# Altium PCB HID.PcbDoc
Units mm, origin at the board's own origin, x right, y up, seen from the top; angles counter-clockwise.
Board outline 33.15 x 33.15 mm, 2 copper layers (Top Layer, Bottom Layer); 10 components, 14 nets, 89 pads, 0 vias.
Unrouted connection lines stored in the file: 14.
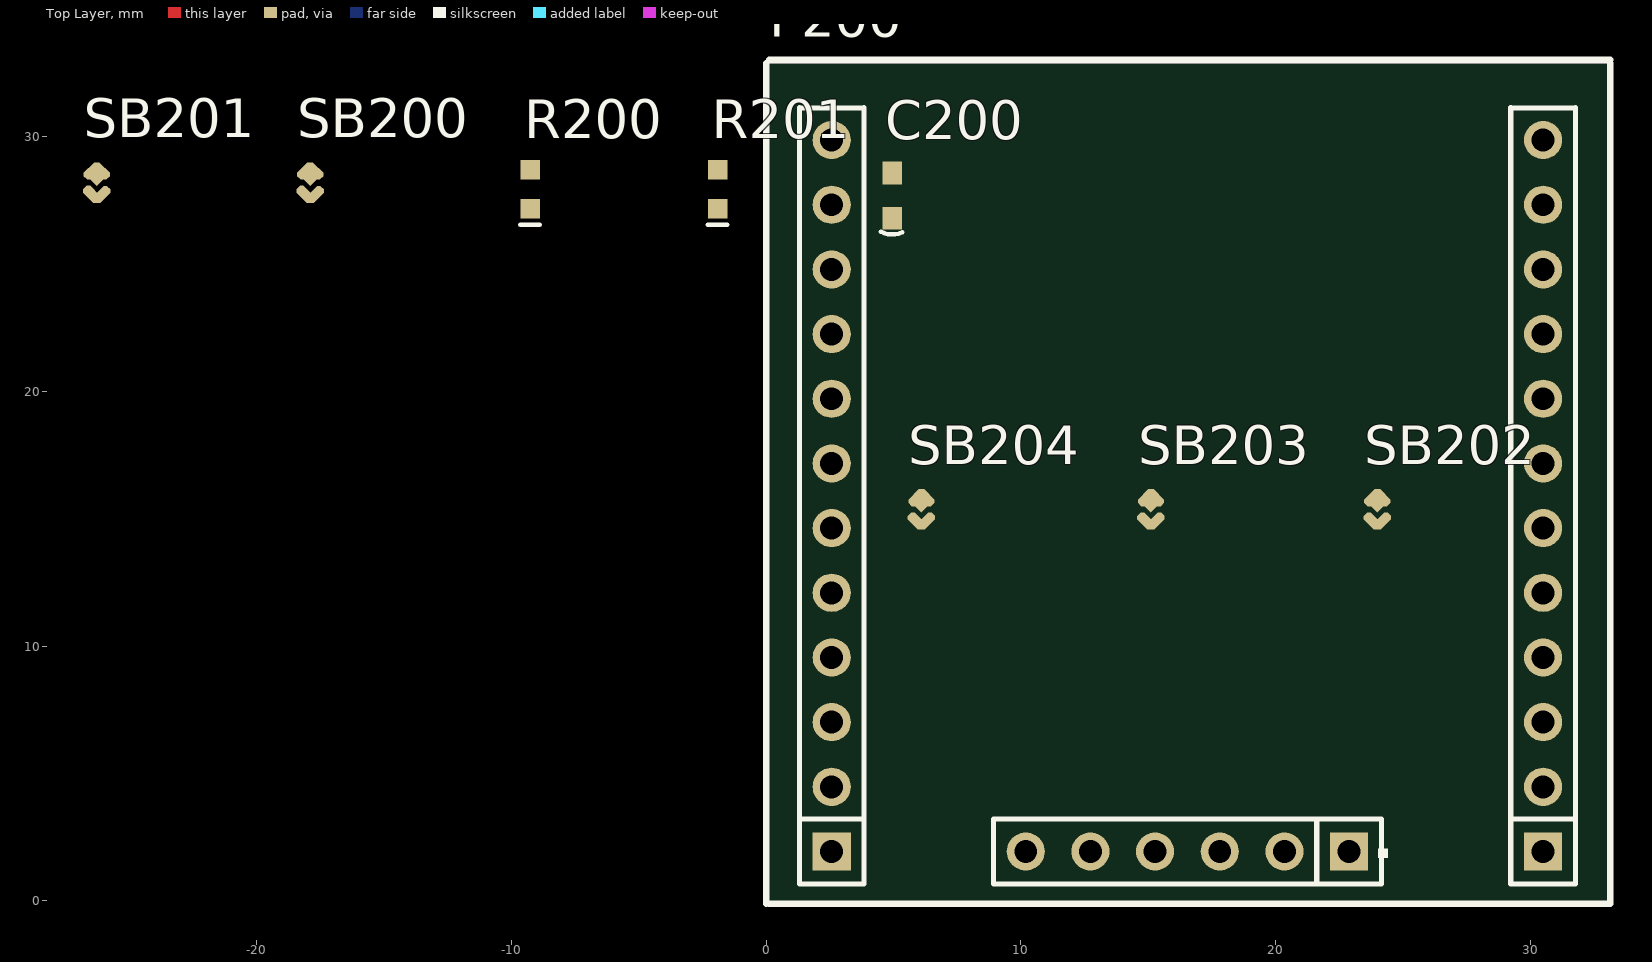
[diagram p0: Top Layer view]
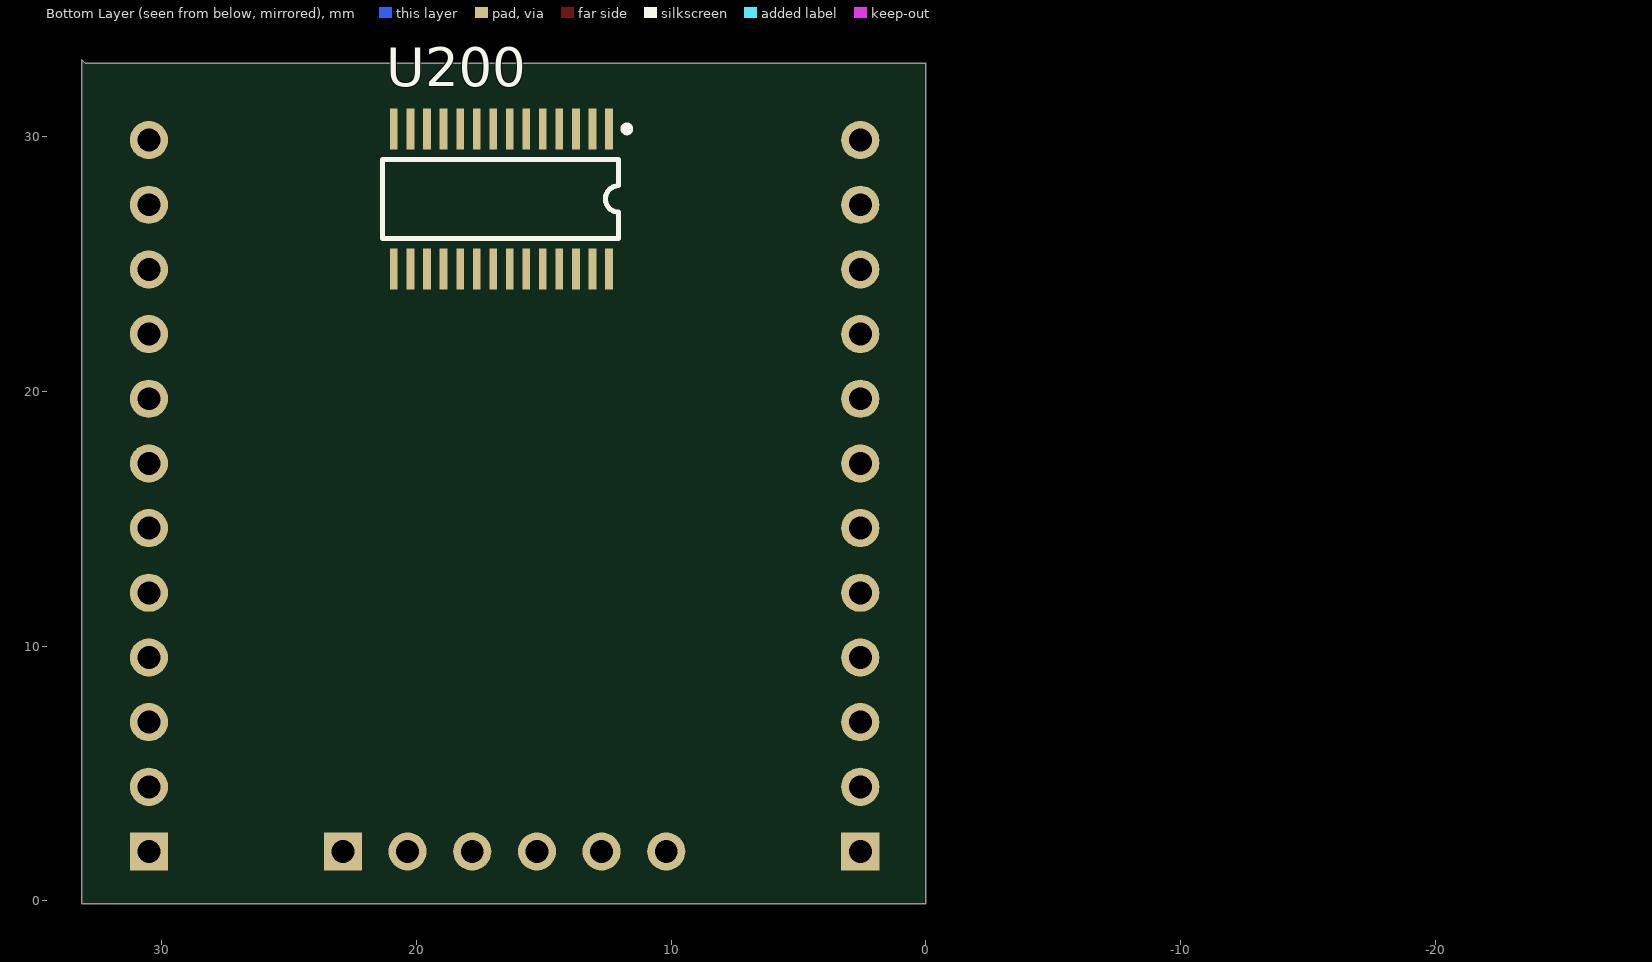
[diagram p1: Bottom Layer view, seen from below]

## Layer stack, top to bottom
Top Solder: solder mask 0.0102, Solder Resist, Dk 3.5
Top Layer: signal copper 0.0356
Dielectric 1: dielectric 0.32, FR-4, Dk 4.8
Bottom Layer: signal copper 0.0356
Bottom Solder: solder mask 0.0102, Solder Resist, Dk 3.5

## Board outline
0,-0.127 0,32.893 33.02,32.893 33.147,33.02 33.147,-0.127

## Design rules (kind name [scope] priority, off if disabled: settings)
Clearance [All] p1: gap=0.254
PolygonConnect [All] p1: connectstyle=Relief reliefconductorwidth=0.254 reliefentries=4 polygonreliefangle="90 Angle" airgapwidth=0.254
RoomDefinition HID [InComponentClass('HID')] p1: confinementstyle=ConfineIn formatcopy=TRUE lockcomponents=FALSE outline -0.381,-0.635 33.655,-0.635 33.655,33.655 -0.381,33.655
RoutingVias [All] p1: holewidth=0.711 width=1.27 viastyle="Through Hole" minholewidth=0.711 minwidth=1.27 maxholewidth=0.711 maxwidth=1.27
SolderMaskExpansion [All] p1: expansion=0.102
Width [All] p1: maxlimit=0.254 minlimit=0.254 preferedwidth=0.254
29 further rules are at their usual default settings.

## Components (designator, comment, footprint, x,y, rotation, side; value= is the part's Value field where it differs from the comment)
C200 "0.1uF" C0603L 4.953,27.686 r90 top
P200 "Synio-Full" Synio-Full 0,-0.127 r0 top
R200 "1K" R0603 -9.271,27.94 r90 top
R201 "1K" R0603 -1.905,27.94 r90 top
SB200 "Circuit Breaker" JP2_SMD -17.907,28.194 r90 top
SB201 "Circuit Breaker" JP2_SMD -26.289,28.194 r90 top
SB202 "Circuit Breaker" JP2_SMD 24.003,15.367 r90 top
SB203 "Circuit Breaker" JP2_SMD 15.113,15.367 r90 top
SB204 "Circuit Breaker" JP2_SMD 6.096,15.367 r90 top
U200 "TTP229BSFN" TSSOP28 18.161,24.13 r270 bottom

## Footprints (in the part's own frame and the unit in brackets; to place one, negate y for a bottom-side part, rotate by r counter-clockwise, add the part's x,y. Pads: shape width x height; smd on the part's side, far side on the other; paste and mask are expansions set on the pad)
C0603L [mil]
  rect 35x30 smd: 1(-35,0) 2(35,0)
  silkscreen extent -60,-16 -56,18, body extent -31,-16 32,15, height 24
JP2_SMD [mil]
  oct 15x30 smd rot 45: 1(-18,-8) 2(18,7)
  oct 15.75x30 smd rot 135: 1(-18,8)
  rect 26x26 smd rot 45: 2(13,0)
  oct 15x30 smd rot 135: 2(18,-7)
R0603 [mil]
  rect 30x30 smd: 1(-30,0) 2(30,0)
  silkscreen extent -55,-15 -55,15, body extent -31,-16 32,15, height 18
Synio-Full [mm]
  round 1.5 hole 0.9: 1(2.575,29.997) 2(2.575,27.457) 3(2.575,24.917) 4(2.575,22.377) 5(2.575,19.837) 6(2.575,17.297) 7(2.575,14.757) 8(2.575,12.217) 9(2.575,9.677) 10(2.575,7.137) 11(2.575,4.597) 13(10.195,2.057) 14(12.735,2.057) 15(15.275,2.057) 16(17.815,2.057) 17(20.355,2.057) 20(30.515,4.597) 21(30.515,7.137) 22(30.515,9.677) 23(30.515,12.217) 24(30.515,14.757) 25(30.515,17.297) 26(30.515,19.837) 27(30.515,22.377) 28(30.515,24.917) 29(30.515,27.457) 30(30.515,29.997)
  rect 1.5x1.5 hole 0.9: 12(2.575,2.057) 18(22.895,2.057) 19(30.515,2.057)
  silkscreen extent 0,0 33.15,33.15, body extent 1.13,0.64 31.99,31.25, height 8.51
TSSOP28 [mm] "Shrink Small Outline; 20 Leads; Body Width 4.4 mm; Pitch 0.65 mm"
  rect 1.6x0.3 smd: 1(-6.179,5.719) 2(-6.179,5.069) 3(-6.179,4.419) 4(-6.179,3.769) 5(-6.179,3.119) 6(-6.179,2.469) 7(-6.179,1.819) 8(-6.179,1.169) 9(-6.179,0.519) 10(-6.179,-0.131) 11(-6.179,-0.781) 12(-6.179,-1.431) 13(-6.179,-2.081) 14(-6.179,-2.731) 15(-0.679,-2.731) 16(-0.679,-2.081) 17(-0.679,-1.431) 18(-0.679,-0.781) 19(-0.679,-0.131) 20(-0.679,0.519) 21(-0.679,1.169) 22(-0.679,1.819) 23(-0.679,2.469) 24(-0.679,3.119) 25(-0.679,3.769) 26(-0.679,4.419) 27(-0.679,5.069) 28(-0.679,5.719)
  silkscreen extent -6.3,-3.17 -1.88,6.54, body extent -5.72,-3.17 -1.14,6.1, height 2.65

## Part data
C200: library part Cap, "Capacitor"
P200: "Synio-Full Header"
R200 R201: library part Res, "Resistor"
U200: library part TP229BSFN, "TOUCH PAD DETECTOR IC"

## Nets (pads, with @x,y where several pads share a name; then routed paths per layer and width w, separated by ;. In a path a pad name is that pad's centre, name@x,y a point inside that pad or via, vN(x,y) a via of type N, cw(c..) or ccw(c..) an arc to the next point about the centre after c; other vN are vias at no path point)
CE: SB203.2 SB204.2
CSN: P200.11
D3V3: C200.1 P200.18 R200.1 R201.1
GND: C200.2 P200.12 P200.17 P200.19
MISO: P200.9
MOSI: P200.8
NetP200_1: P200.1 SB200.1
NetP200_2: P200.2 SB201.1
NetP200_3: P200.3 SB202.1
NetP200_20: P200.20 SB204.1
NetP200_21: P200.21 SB203.1
NetSB200_2: SB200.2 SB201.2 SB202.2
NRST: P200.14
SCK: P200.10
pads on no net: P200.4 P200.5 P200.6 P200.7 P200.13 P200.15 P200.16 P200.22 P200.23 P200.24 P200.25 P200.26 P200.27 P200.28 P200.29 P200.30 R200.2 R201.2 U200.1 U200.2 U200.3 U200.4 U200.5 U200.6 U200.7 U200.8 U200.9 U200.10 U200.11 U200.12 U200.13 U200.14 U200.15 U200.16 U200.17 U200.18 U200.19 U200.20 U200.21 U200.22 U200.23 U200.24 U200.25 U200.26 U200.27 U200.28

## Silkscreen, mask and mechanical layers (free items; w line width, h text height)
Top Overlay:
  lines w0.254: 0,-0.127 0,32.893 ; 0.127,-0.127 33.147,-0.127 33.147,32.893 ; 0.127,33.02 33.147,33.02